# Altium PCB MDES_V3.PcbDoc (part 1 of 2)
Units mil, origin at the board's own origin, x right, y up, seen from the top; angles counter-clockwise.
Board outline 6000 x 4000 mil, 6 copper layers (Component Side, Ground Plane (GND), Inner Layer 1, Inner Layer 2, Power Plane (VCC), Solder Side), stack 51.068 mil thick; 209 components, 153 nets, 733 pads, 136 vias.
Unrouted connection lines stored in the file: 303.
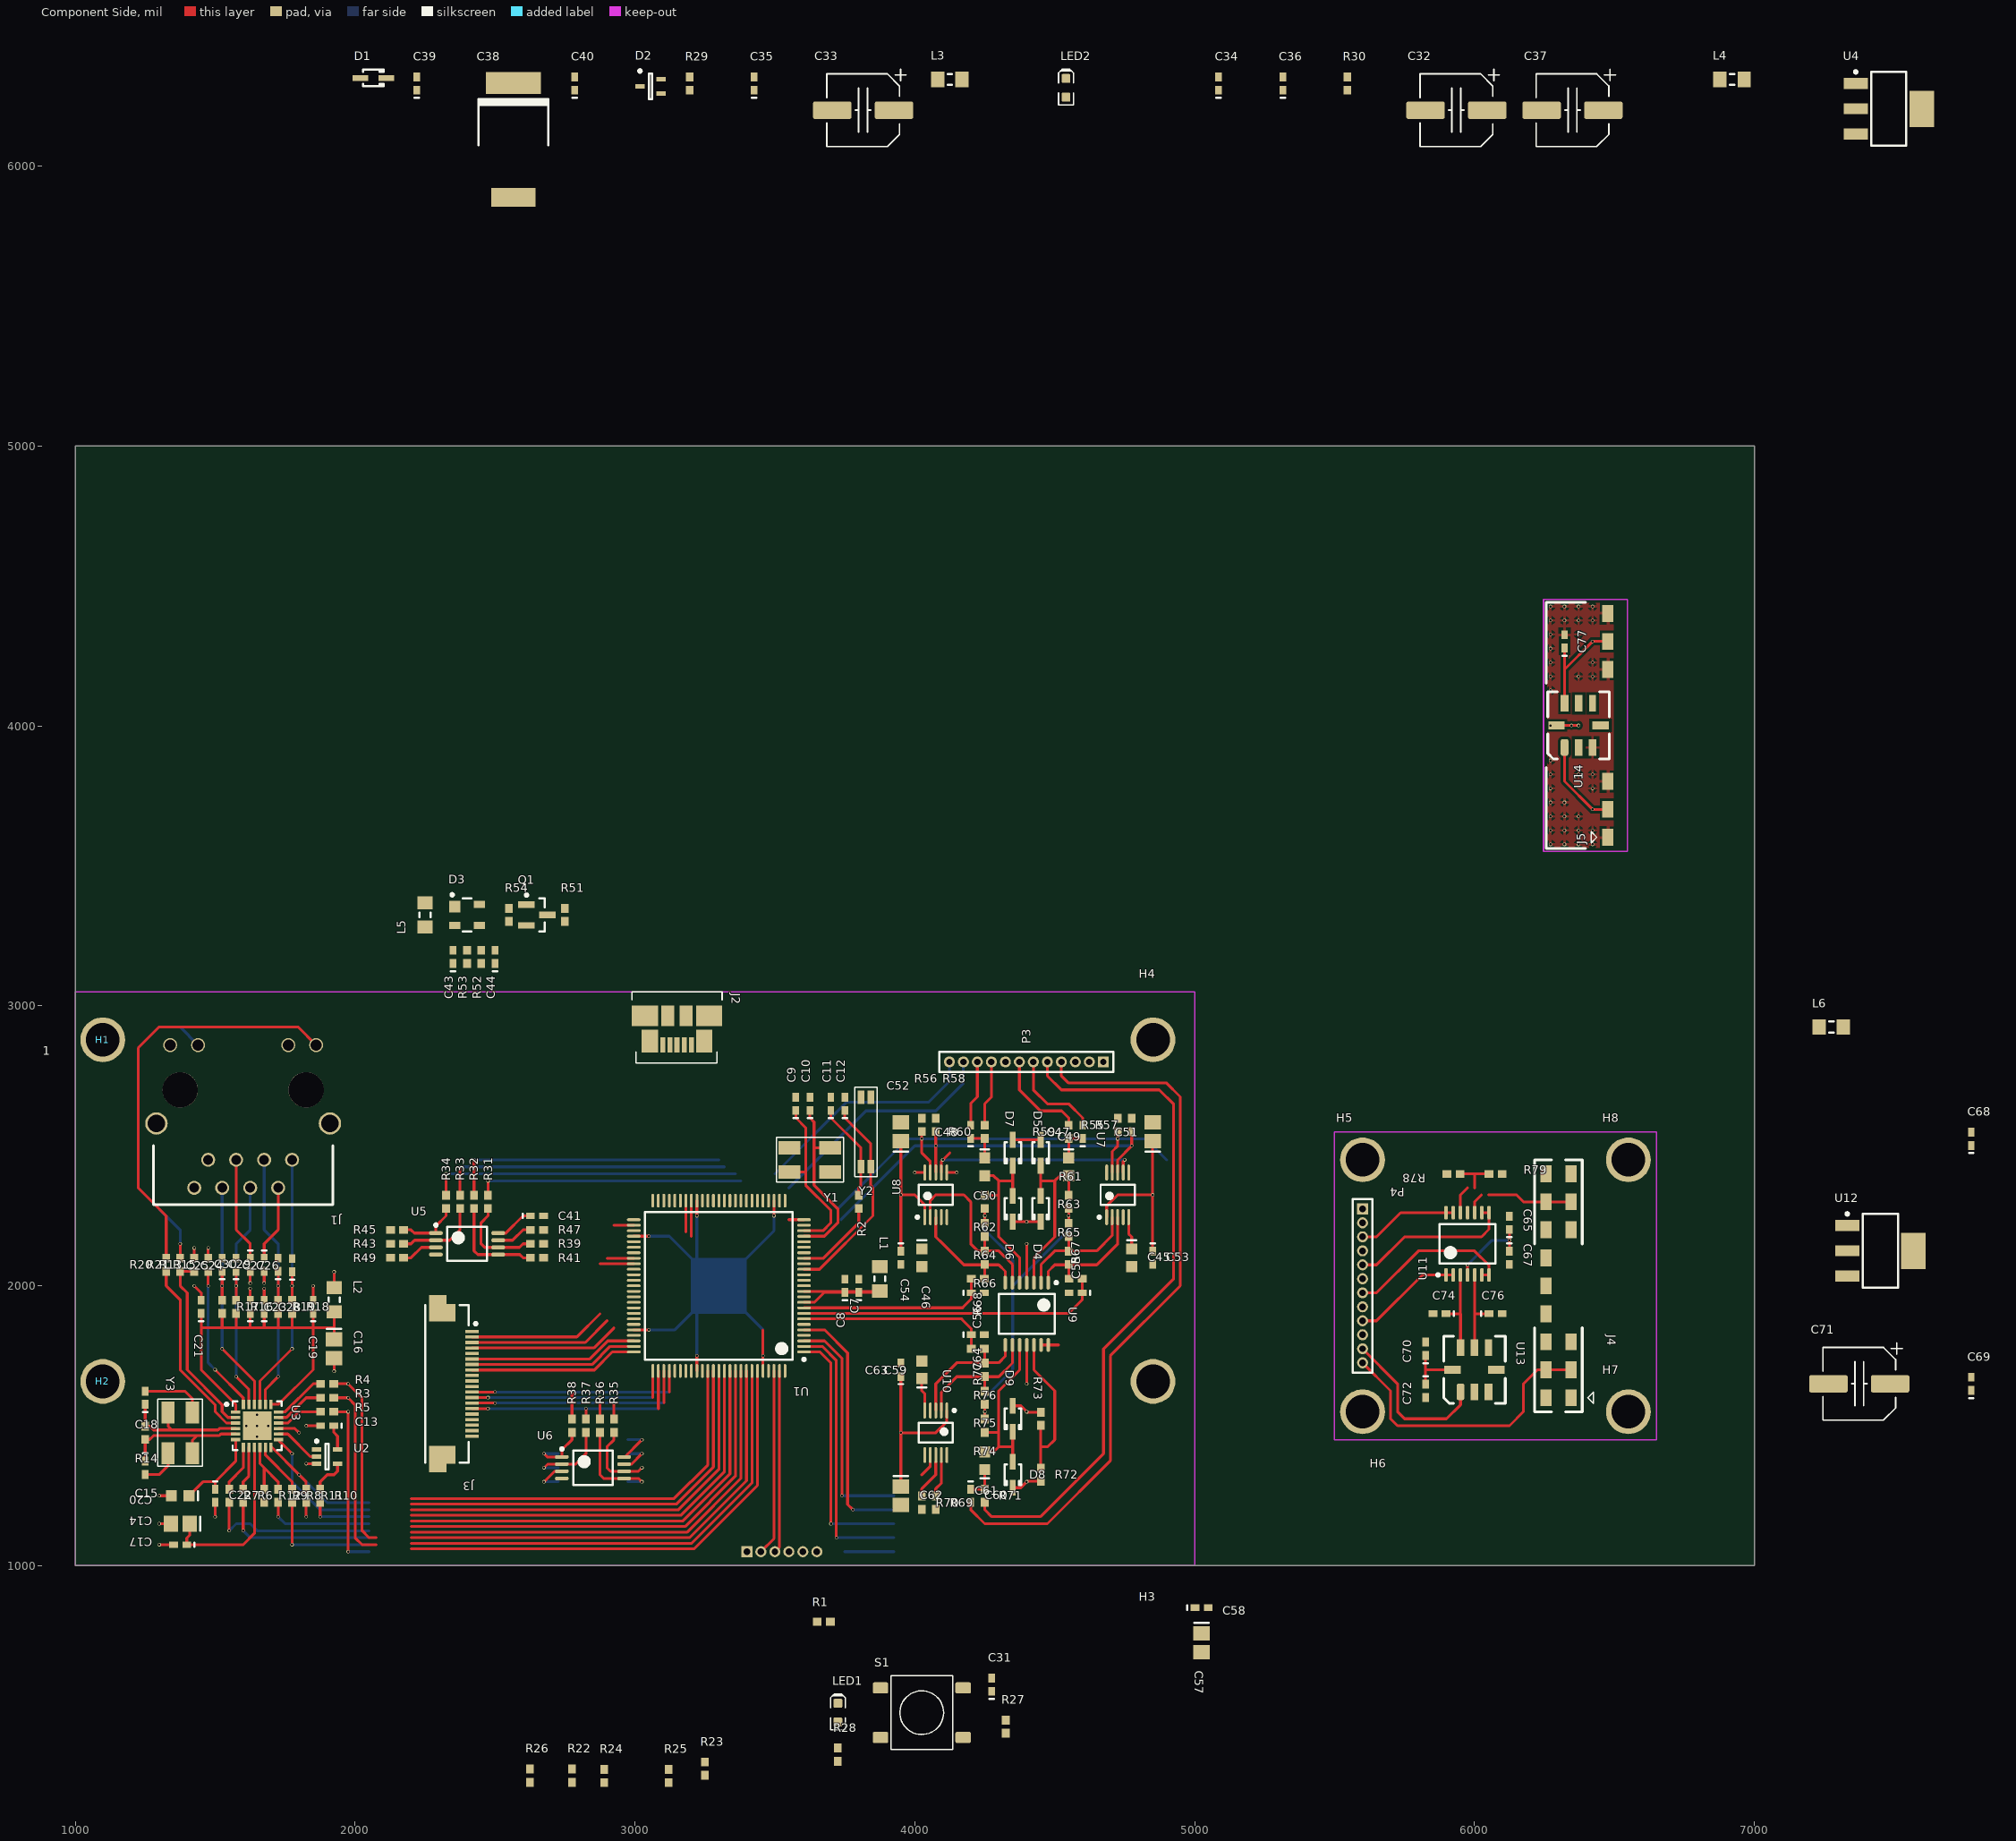
[diagram p0: Component Side view]
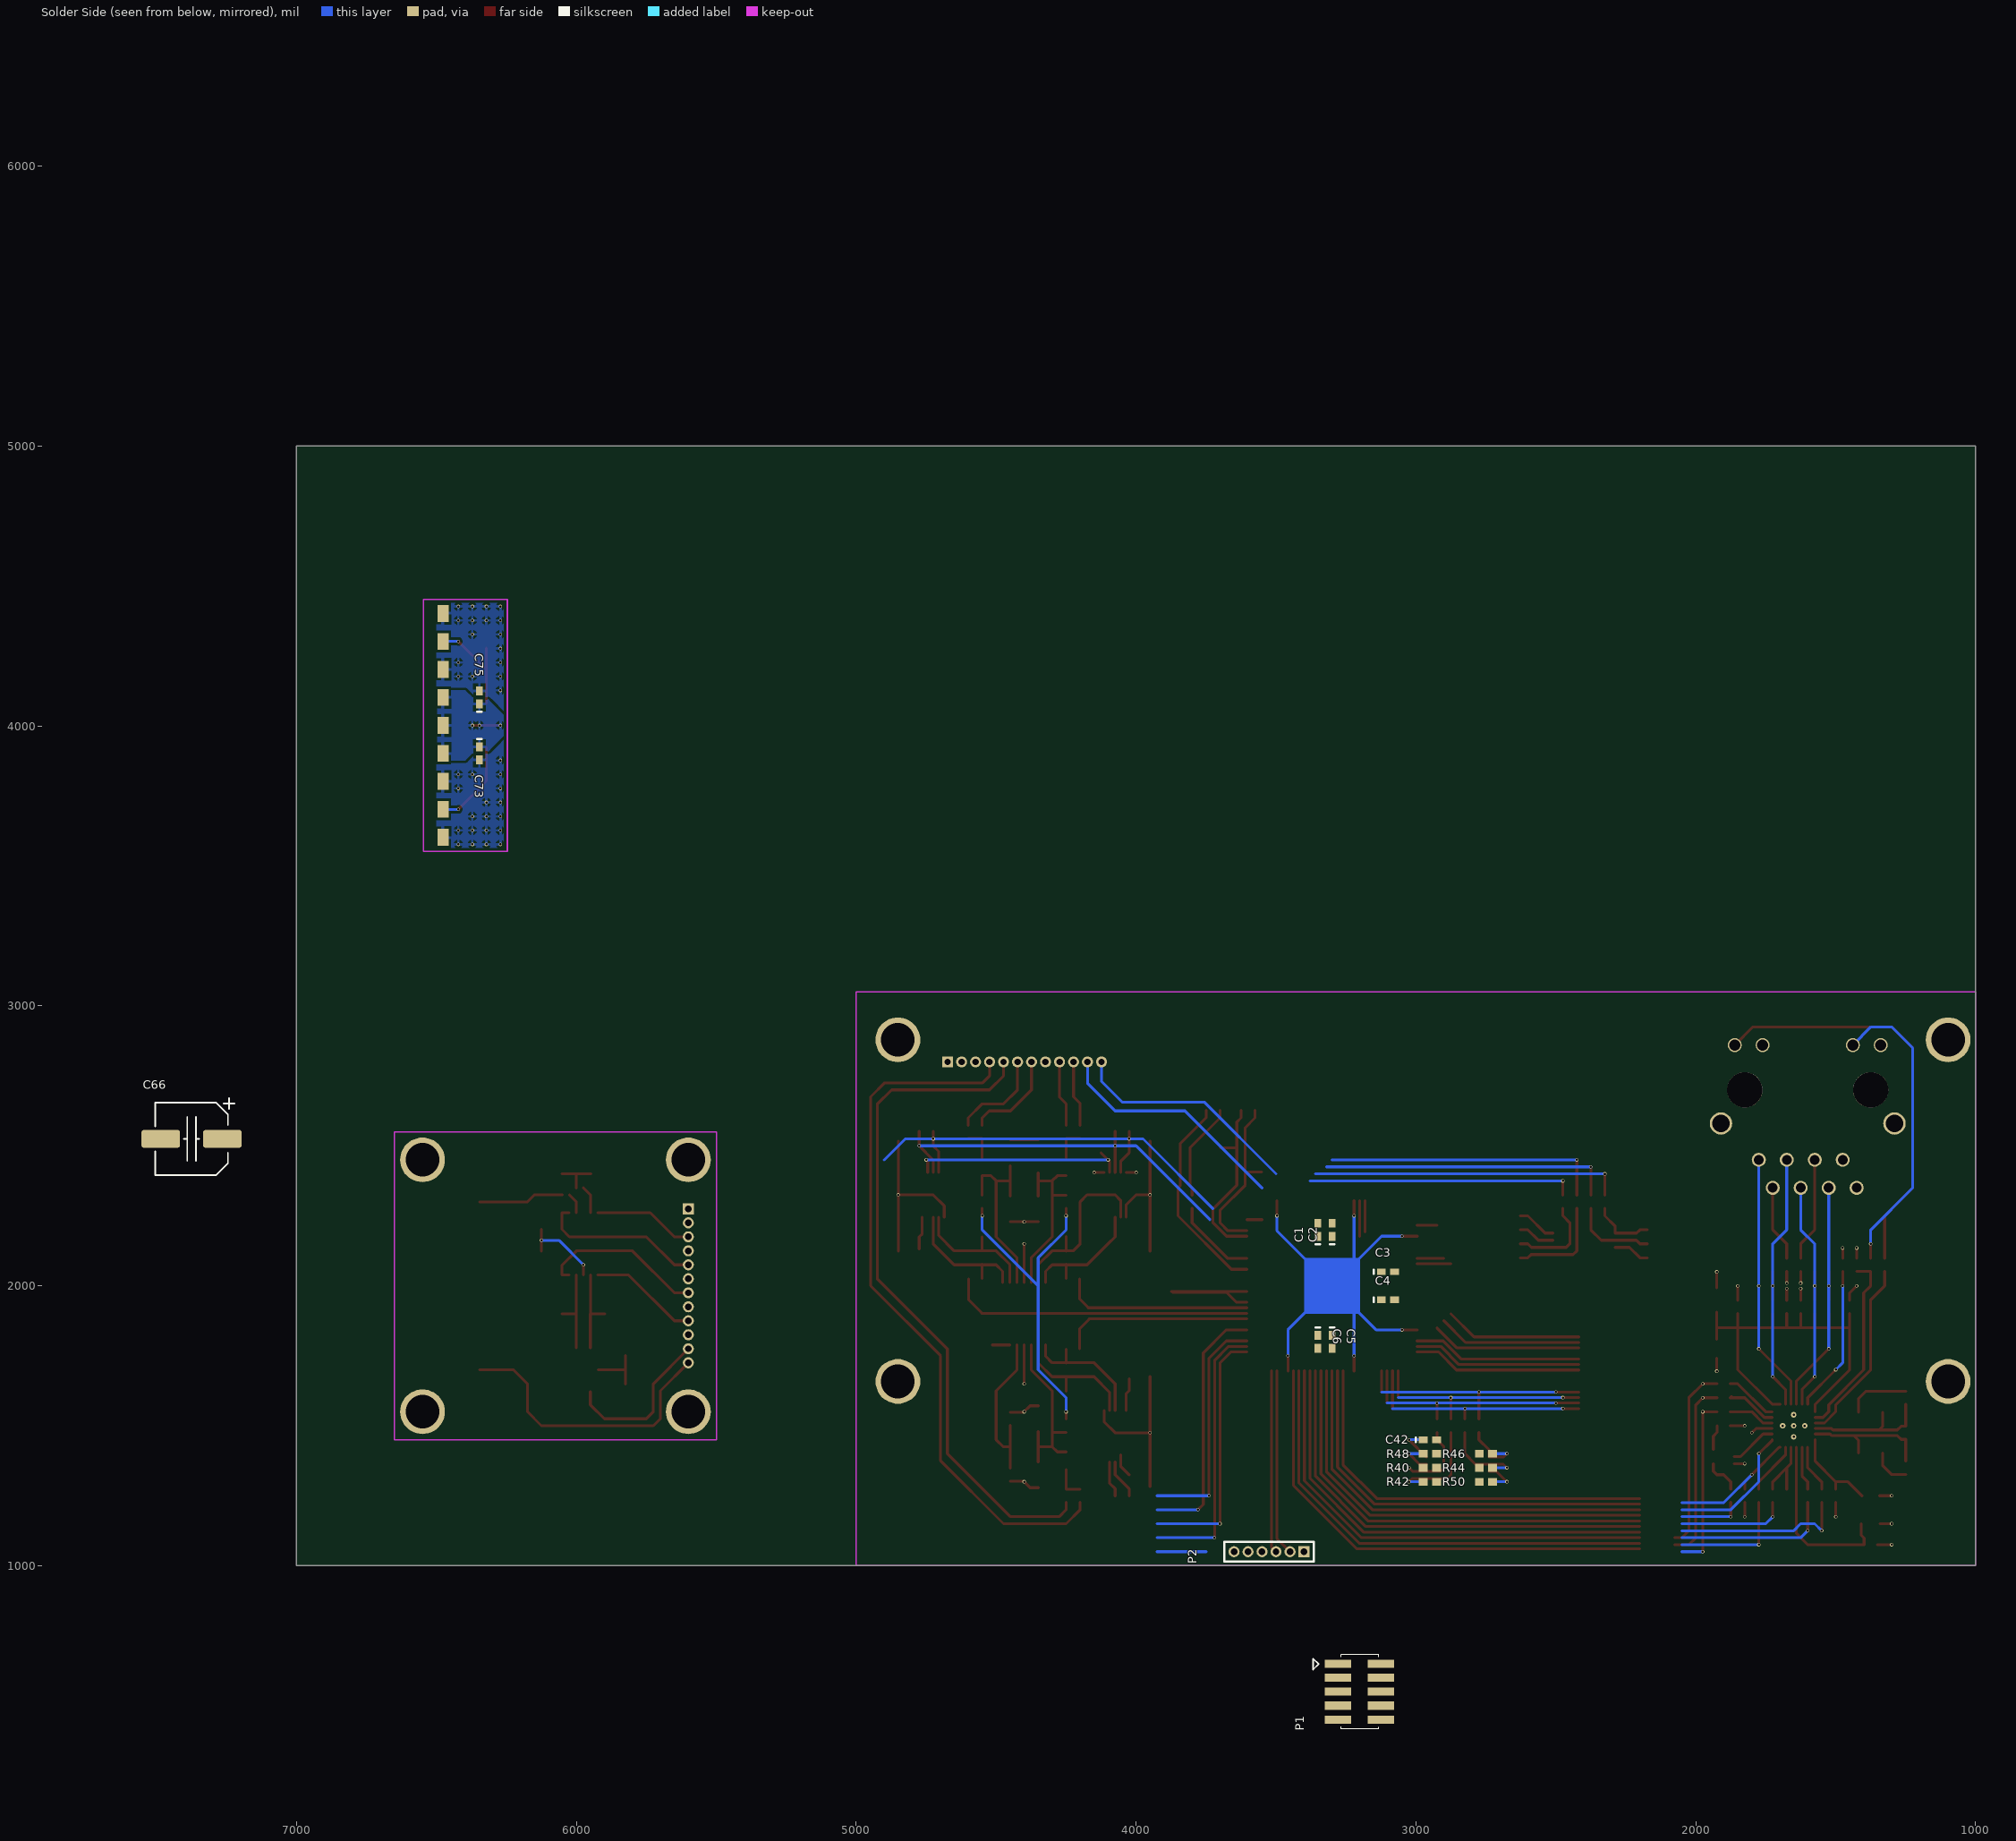
[diagram p1: Solder Side view, seen from below]
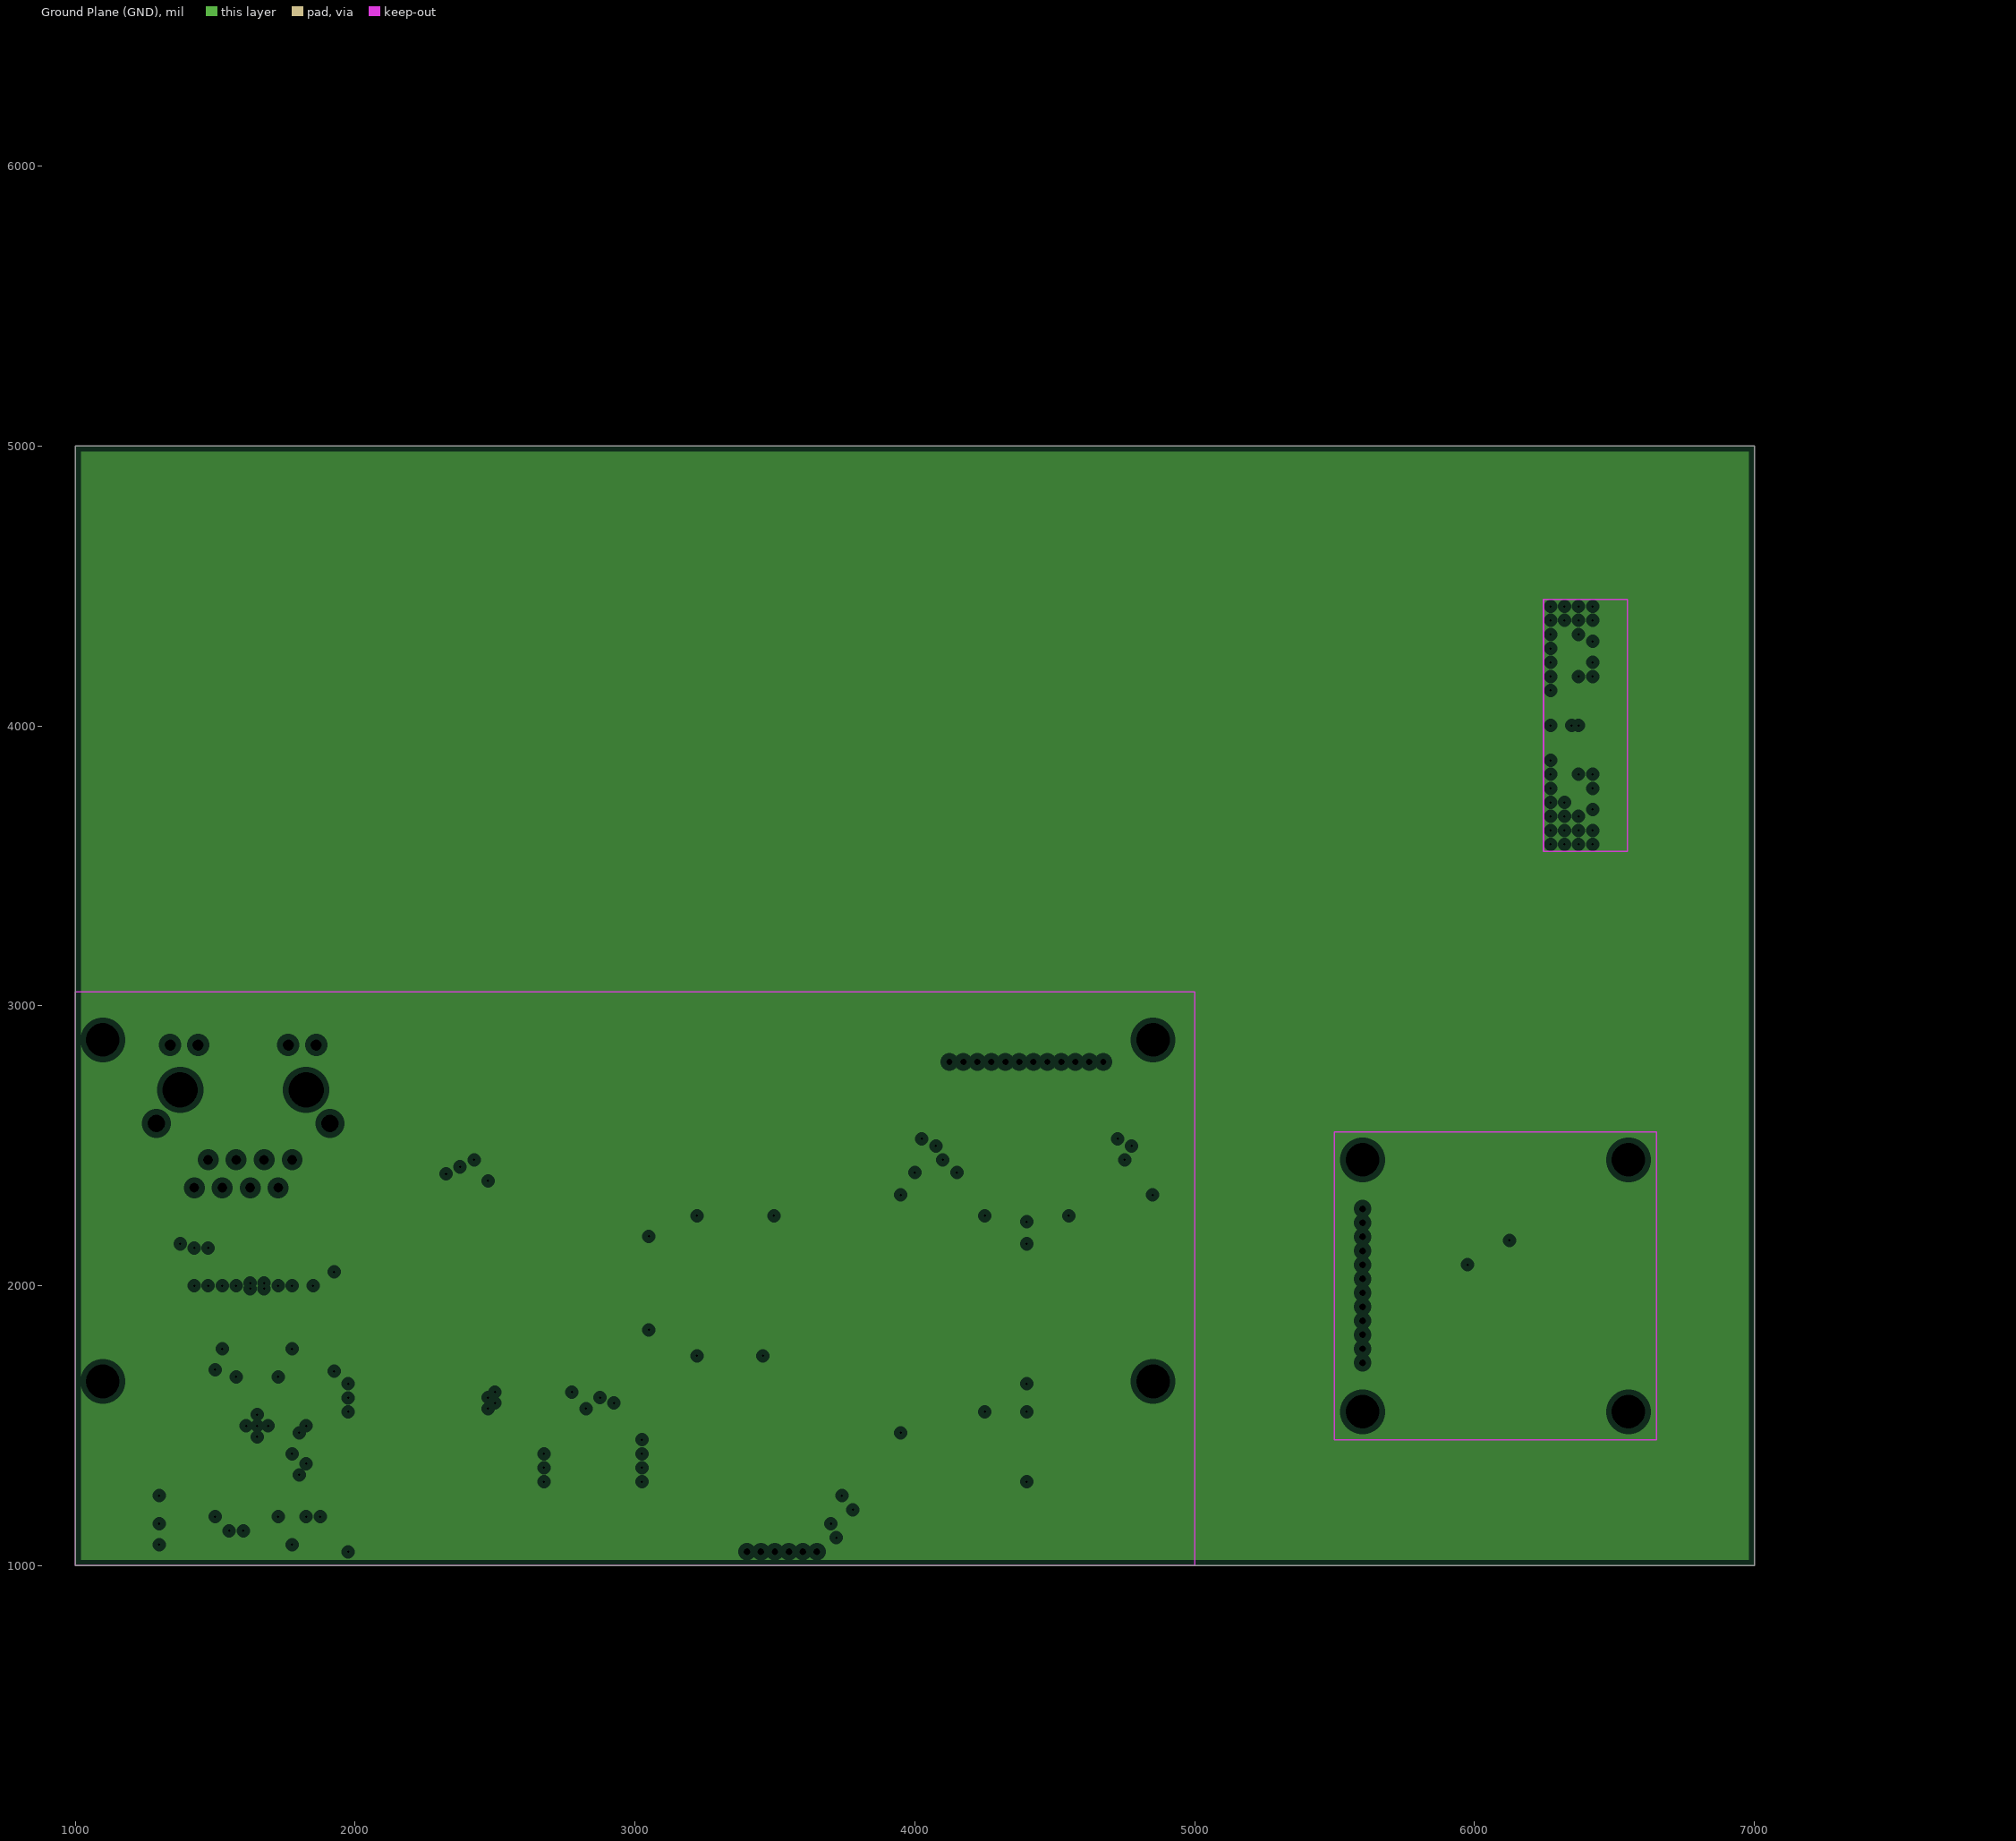
[diagram p2: Ground Plane (GND), clearances drawn from the general rule]
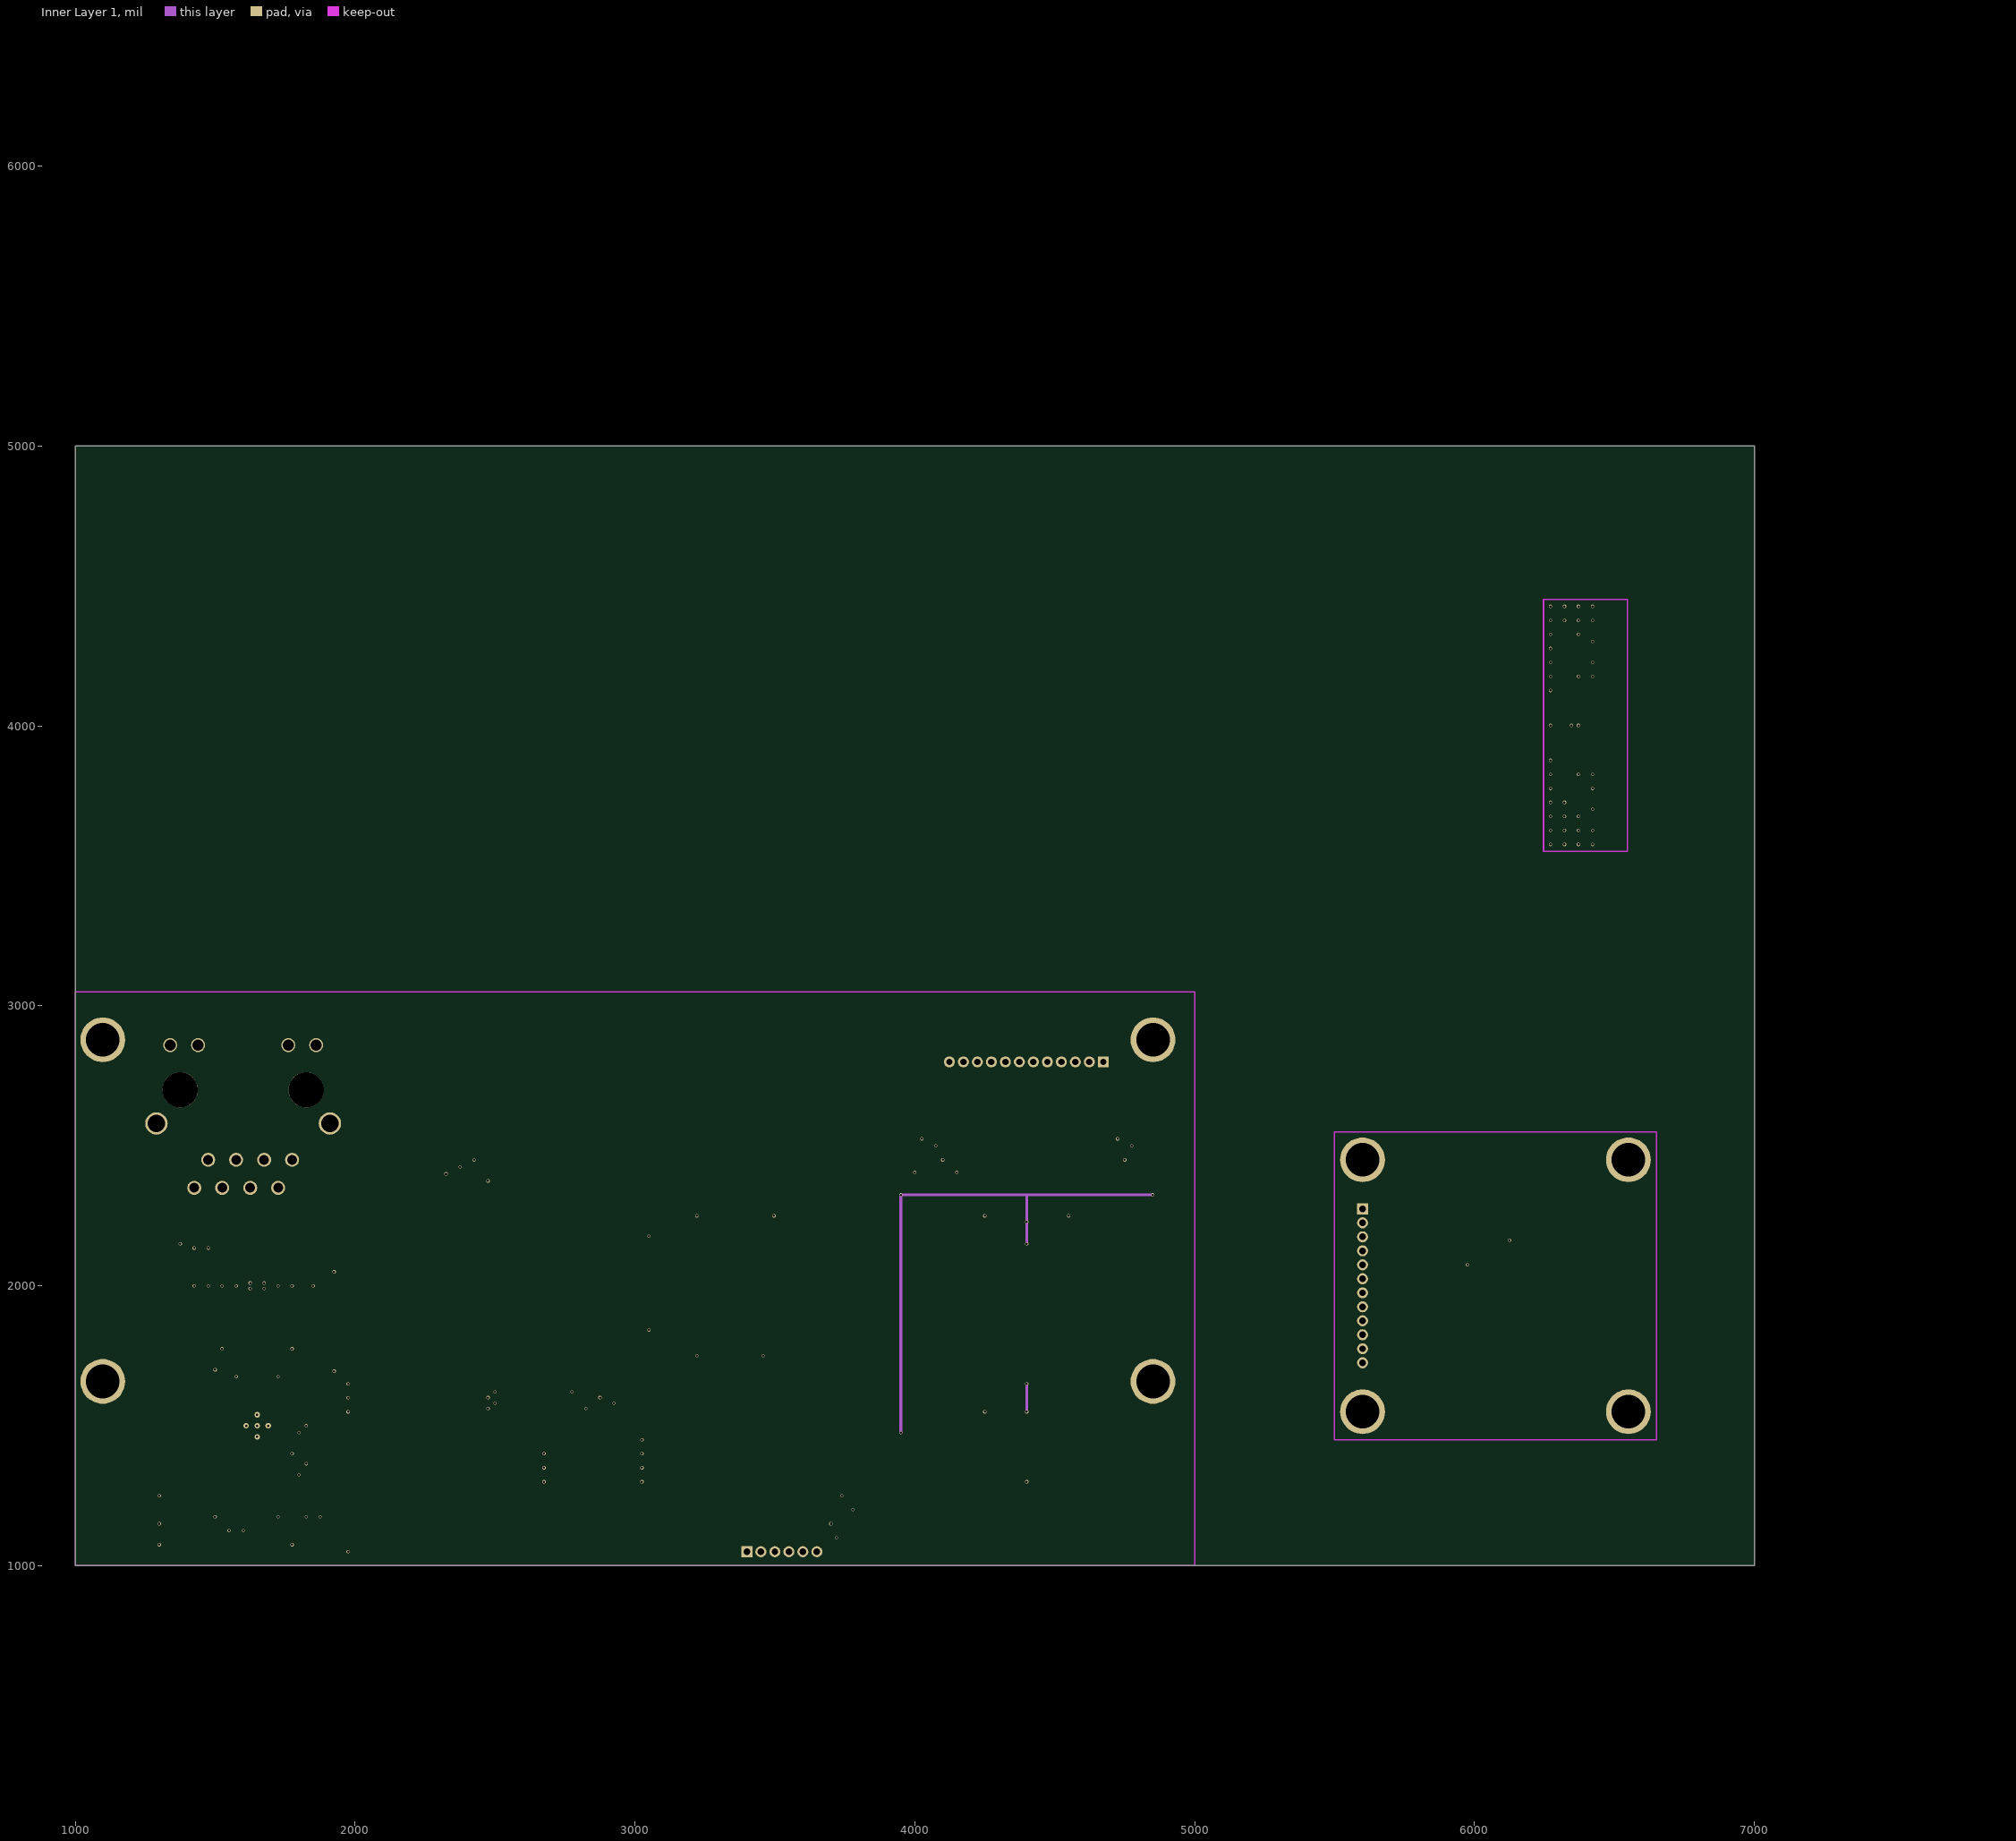
[diagram p3: Inner Layer 1]
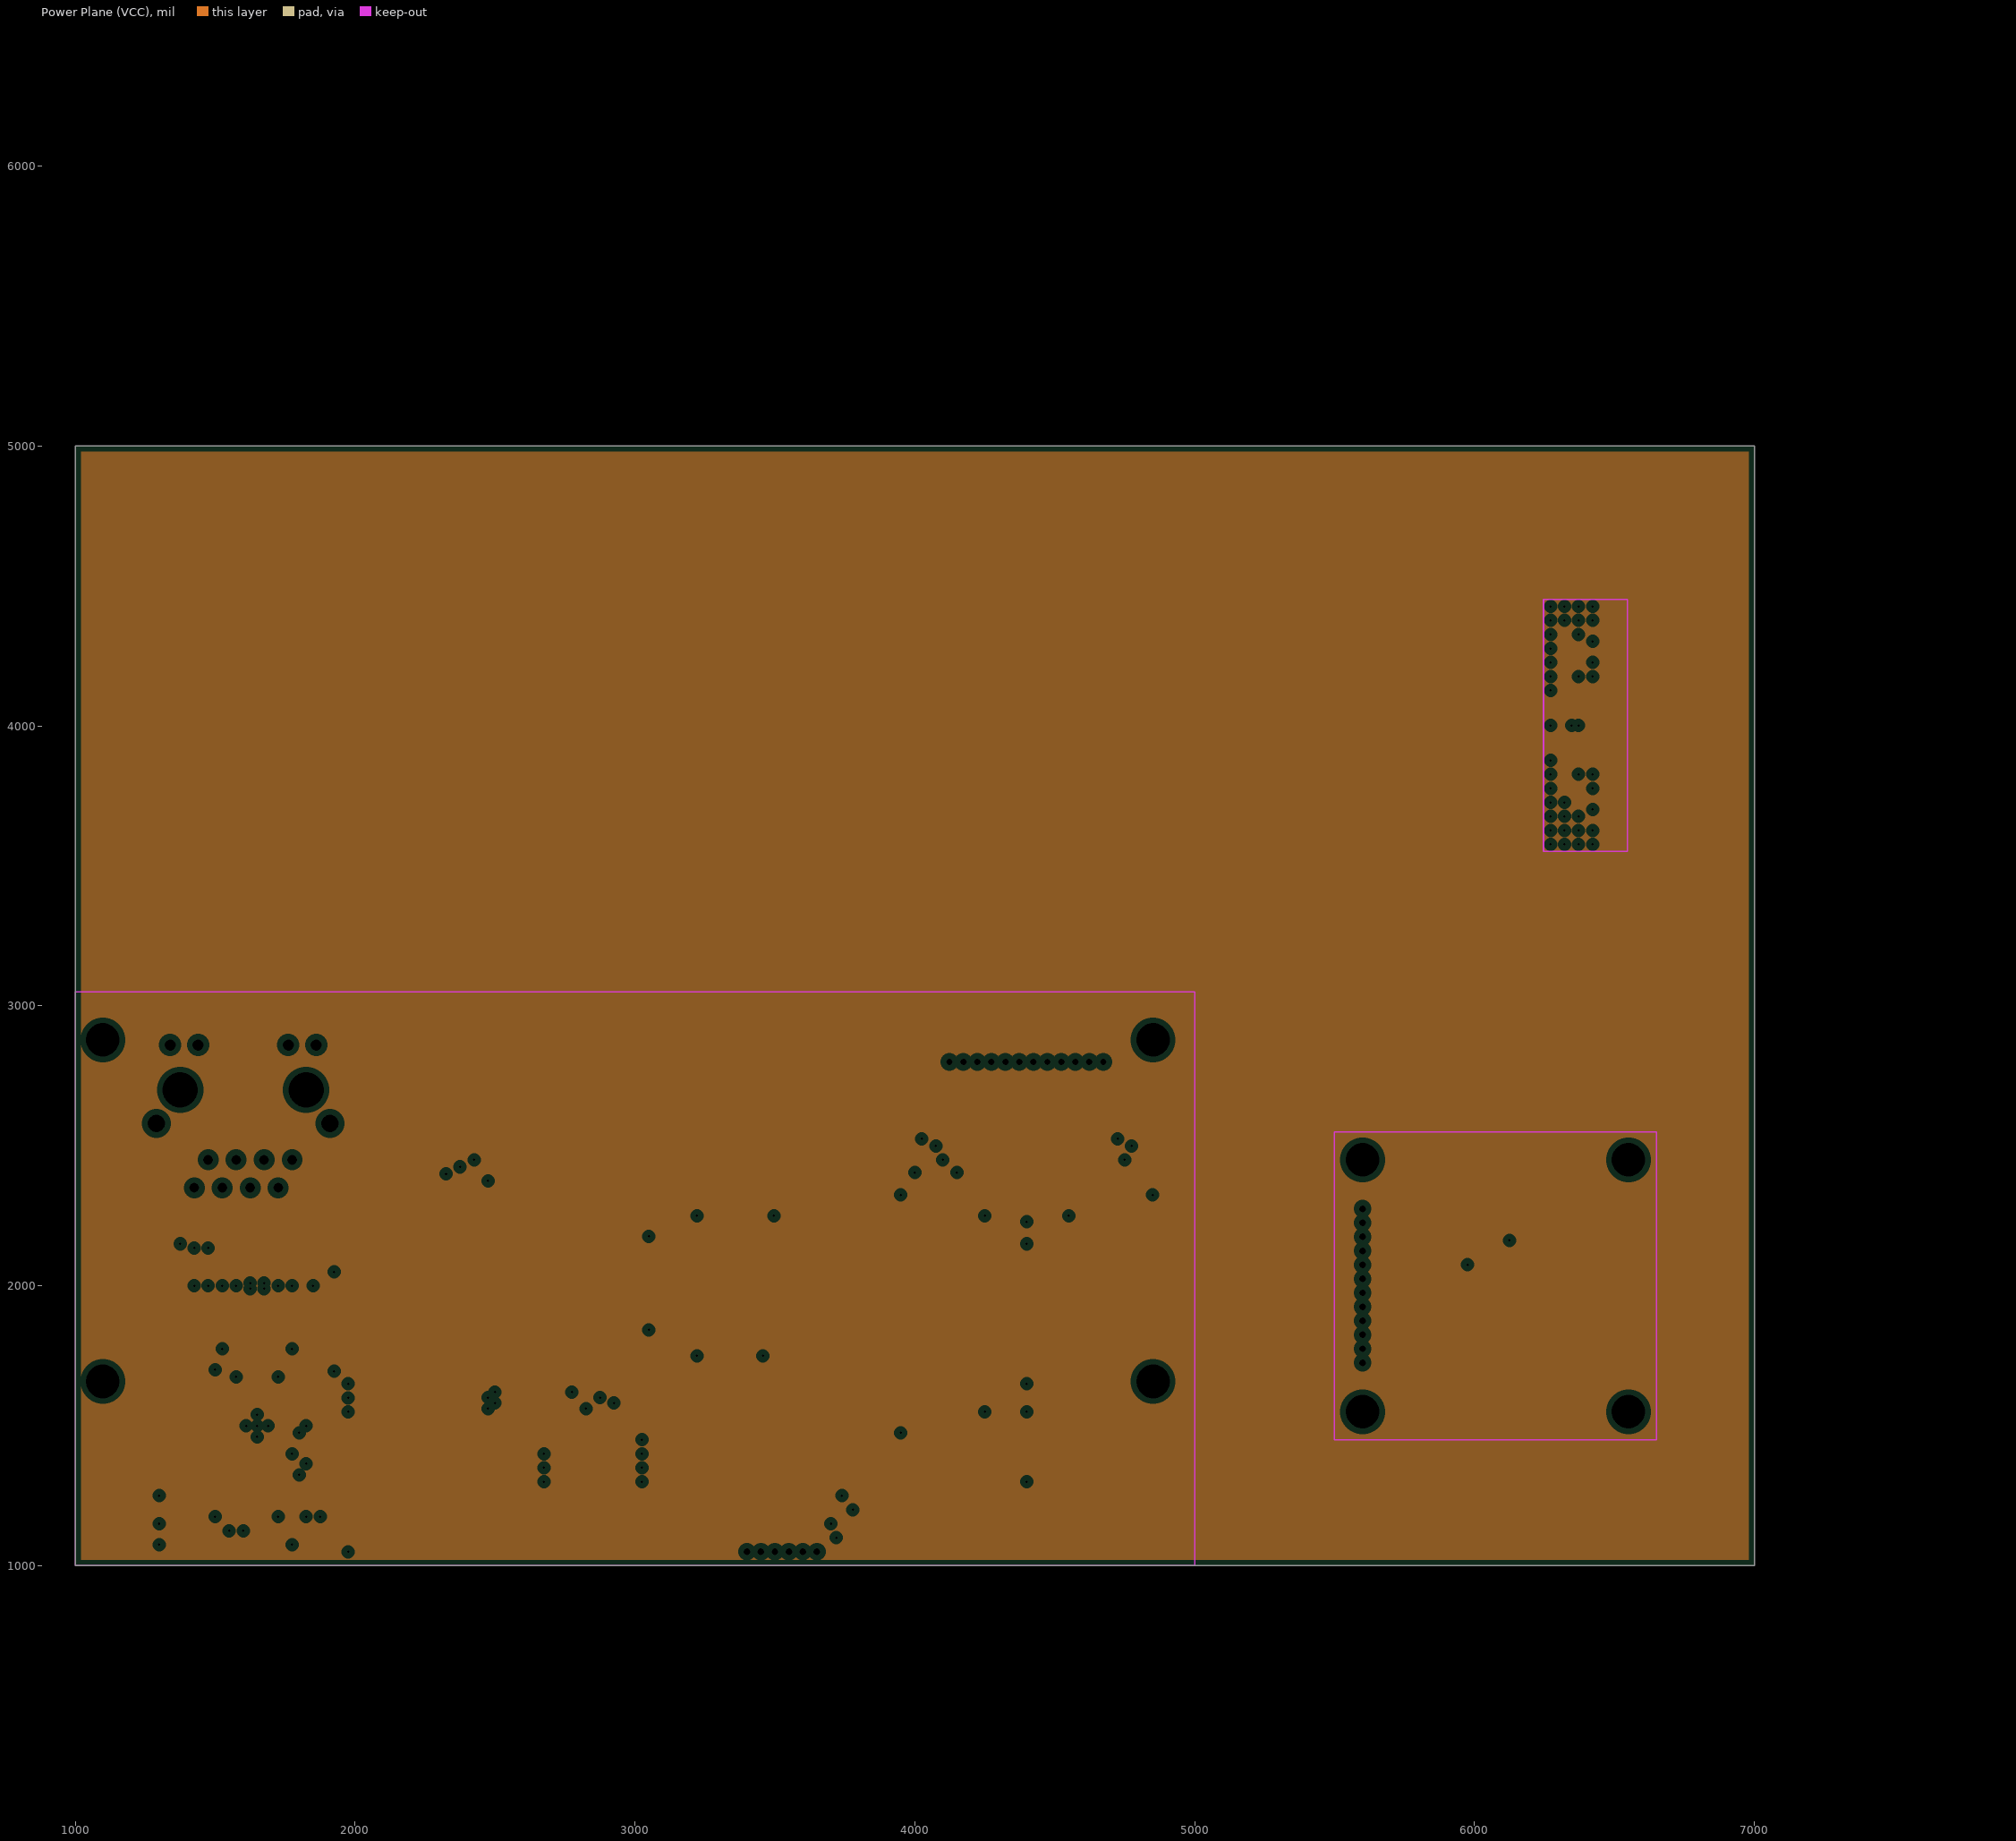
[diagram p4: Power Plane (VCC), clearances drawn from the general rule]

## Layer stack, top to bottom
Top Solder: solder mask 0.4, Solder Resist, Dk 3.5
Component Side: signal copper 1.4
Dielectric 1: core 12.6, FR-4, Dk 4.8
Ground Plane (GND): plane copper 1.417
Dielectric 3: prepreg 5, Dk 4.2
Inner Layer 1: signal copper 1.417
Dielectric 6: core 10, Dk 4.2
Inner Layer 2: signal copper 1.417
Dielectric 5: prepreg 5, Dk 4.2
Power Plane (VCC): plane copper 1.417
Dielectric 4: core 10, Dk 4.2
Solder Side: signal copper 1.4
Bottom Solder: solder mask 0.4, Solder Resist, Dk 3.5

## Board outline
1000,1000 7000,1000 7000,5000 1000,5000

## Design rules (kind name [scope] priority, off if disabled: settings)
Clearance Clearance_BTB [InComponent('J5') vs OnLayer('Keep-Out Layer')] p1: gap=-10
Clearance [All] p2: gap=6
ComponentClearance ComponentClearance_BTB [InComponent('J5')] p1: gap=0 collisioncheckmode=3 verticalgap=0 showdistances=FALSE
ComponentClearance [All] p2: gap=10 collisioncheckmode=3 verticalgap=10 showdistances=FALSE
PlaneClearance [All] p1: clearance=20
PlaneConnect [All] p1: planeconnectstyle=Relief reliefexpansion=20 reliefentries=4 reliefconductorwidth=10 reliefairgap=10
PolygonConnect [All] p1: connectstyle=Relief reliefconductorwidth=10 reliefentries=4 polygonreliefangle="90 Angle" airgapwidth=10
RoutingVias [All] p1: holewidth=120 width=180 viastyle="Through Hole" minholewidth=8 minwidth=12 maxholewidth=28 maxwidth=50
SolderMaskExpansion [All] p1: expansion=4
Width [All] p1: maxlimit=10 minlimit=10 preferedwidth=10
27 further rules are at their usual default settings.

## Classes and differential pairs
component class Accelerometer: C65 C66 C67 C68 C69 C70 C71 C72 C73 C74 C75 C76 C77 H5 H6 H7 H8 J4 J5 L6 P4 R78 R79 U11 U12 U13 U14
component class "Analog Input": C45 C46 C47 C48 C49 C50 C51 C52 C53 C54 C55 C56 C57 C58 C59 C60 C61 C62 C63 C64 D4 D5 D6 D7 D8 D9 P3 R55 R56 R57 R58 R59 R60 R61 R62 R63 R64 R65 R66 R67 R68 R69 R70 R71 R72 R73 R74 R75 R76 R77 U7 U8 U9 U10
component class "Debug and Reset": C31 LED1 P1 P2 R22 R23 R24 R25 R26 R27 R28 S1
component class Ethernet: C13 C14 C15 C16 C17 C18 C19 C20 C21 C22 C23 C24 C25 C26 C27 C28 C29 C30 J1 L2 R3 R4 R5 R6 R7 R8 R9 R10 R11 R12 R13 R14 R15 R16 R17 R18 R19 R20 R21 U2 U3 Y3
component class "Expansion connectors": J3
component class LPC1769: C1 C2 C3 C4 C5 C6 C7 C8 C9 C10 C11 C12 L1 R1 R2 U1 Y1 Y2
component class "Power supply": C32 C33 C34 C35 C36 C37 C38 C39 C40 D1 D2 H1 H2 H3 H4 L3 L4 LED2 R29 R30 U4
component class "SPI peripherals": C41 C42 R31 R32 R33 R34 R35 R36 R37 R38 R39 R40 R41 R42 R43 R44 R45 R46 R47 R48 R49 R50 U5 U6
component class USB: C43 C44 D3 J2 L5 Q1 R51 R52 R53 R54

## Components (designator, comment, footprint, x,y, rotation, side; value= is the part's Value field where it differs from the comment)
C1 "100n" CAPC1005N 3350,2200 r90 bottom
C2 "10n" CAPC1005N 3300,2200 r90 bottom
C3 "100n" CAPC1005N 3100,2050 r180 bottom
C4 "10n" CAPC1005N 3100,1950 r180 bottom
C5 "100n" CAPC1005N 3300,1800 r270 bottom
C6 "10n" CAPC1005N 3350,1800 r270 bottom
C7 "100n" CAPC1005N 3800,2000 r90 top
C8 "10n" CAPC1005N 3750,2000 r90 top
C9 "22p" CAPC1005N 3575,2650 r90 top
C10 "22p" CAPC1005N 3625,2650 r90 top
C11 "22p" CAPC1005N 3700,2650 r90 top
C12 "22p" CAPC1005N 3750,2650 r90 top
C13 "100n" CAPC1005N 1900,1500 r180 top
C14 "10u" CAPC2012N 1375,1150 r180 top
C15 "18p" CAPC1005N 1250,1350 r270 top
C16 "10u" CAPC2012N 1925,1775 r270 top
C17 "100n" CAPC1005N 1375,1075 r180 top
C18 "18p" CAPC1005N 1250,1600 r90 top
C19 "100n" CAPC1005N 1850,1925 r90 top
C20 "1u" CAPC1608N 1375,1250 r180 top
C21 "100n" CAPC1005N 1450,1925 r90 top
C22 "100n" CAPC1005N 1500,1250 r270 top
C23 "100n" CAPC1005N 1625,1925 r90 top
C24 "18p" CAPC1005N 1575,2075 r90 top
C25 "18p" CAPC1005N 1525,2075 r90 top
C26 "18p" CAPC1005N 1775,2073.62 r90 top
C27 "18p" CAPC1005N 1725,2075 r90 top
C28 "100n" CAPC1005N 1675,1925 r90 top
C29 "100n" CAPC1005N 1675,2075 r270 top
C30 "100n" CAPC1005N 1625,2075 r270 top
C31 "100n" CAPC1005N 4275,575 r90 top
C32 "220uF" CAP_ELEC_SIZE_D8 5935.24,6200 r0 top
C33 "220uF" CAP_ELEC_SIZE_D8 3815.24,6200 r0 top
C34 "100n" CAPC1005N 5085.24,6295 r90 top
C35 "100n" CAPC1005N 3425.24,6295 r90 top
C36 "100n" CAPC1005N 5315.24,6295 r90 top
C37 "220uF" CAP_ELEC_SIZE_D8 6350.24,6200 r0 top
C38 "220mF" CAPC3225N 2565.24,6090 r0 top
C39 "10u" CAPC1005N 2220.24,6295 r90 top
C40 "100n" CAPC1005N 2785.24,6295 r90 top
C41 "100n" CAPC1005N 2650,2250 r0 top
C42 "100n" CAPC1005N 2950,1450 r180 bottom
C43 "18p" CAPC1005N 2350,3175 r90 top
C44 "18p" CAPC1005N 2500,3175 r90 top
C45 "1u" CAPC1608N 4775,2100 r270 top
C46 "1u" CAPC1608N 4025,2100 r270 top
C47 "100n" CAPC1005N 4600,2550 r90 top
C48 "100n" CAPC1005N 4200,2550 r90 top
C49 "1u" CAPC1608N 4550,2425 r270 top
C50 "1u" CAPC1608N 4250,2425 r270 top
C51 "10u" CAPC2012N 4850,2550 r90 top
C52 "10u" CAPC2012N 3950,2550 r90 top
C53 "100n" CAPC1005N 4850,2100 r270 top
C54 "100n" CAPC1005N 3950,2100 r270 top
C55 "100n" CAPC1005N 4575,1975 r180 top
C56 "100n" CAPC1005N 4225,1975 r0 top
C57 "10u" CAPC2012N 5025,725 r270 top
C58 "100n" CAPC1005N 5025,850 r0 top
C59 "1u" CAPC1608N 4025,1700 r90 top
C60 "100n" CAPC1005N 4200,1250 r270 top
C61 "1u" CAPC1608N 4250,1375 r90 top
C62 "10u" CAPC2012N 3950,1250 r270 top
C63 "100n" CAPC1005N 3950,1700 r90 top
C64 "100n" CAPC1005N 4225,1825 r0 top
C65 "10u" CAPC1005N 6125,2225 r90 top
C66 "220uF" CAP_ELEC_SIZE_D8 7375,2525 r180 bottom
C67 "100n" CAPC1005N 6125,2100 r270 top
C68 "100n" CAPC1005N 7775,2525 r90 top
C69 "100n" CAPC1005N 7775,1650 r90 top
C70 "100n" CAPC1005N 5825,1775 r90 top
C71 "220uF" CAP_ELEC_SIZE_D8 7375,1650 r0 top
C72 "10n" CAPC1005N 5825,1625 r270 top
C73 "100n" CAPC1005N 6346.81,3902.13 r270 bottom
C74 "1n" CAPC1005N 5875,1900 r180 top
C75 "10n" CAPC1005N 6346.81,4102.13 r90 bottom
C76 "1n" CAPC1005N 6075,1900 r0 top
C77 "1n" CAPC1005N 6321.81,4302.13 r90 top
D1 "UL" SOD323 2065.24,6315 r0 top
D2 "BAS40-05W" SOT323(SC70) 3055.24,6285 r0 top
D3 "PRTR5V0U2X" SOT190P230X120-4N 2400,3325 r0 top
D4 "1N4448" SOD323 4450,2275 r270 top
D5 "1N4448" SOD323 4450,2475 r270 top
D6 "1N4448" SOD323 4350,2275 r270 top
D7 "1N4448" SOD323 4350,2475 r270 top
D8 "1N4448" SOD323 4350,1325 r270 top
D9 "1N4448" SOD323 4350,1525 r270 top
H1 "3.1mm" Holes#1 700,2900 r0 top
H2 "3.1mm" Holes#2 500,1200 r0 top
H3 "3.1mm" Holes#3 6000,700 r0 top
H4 "3.1mm" Holes#4 6100,3400 r0 top
H5 "3.1mm" Holes#5 5600,2450 r0 top
H6 "3.1mm" Holes#5 5600,1550 r0 top
H7 "3.1mm" Holes#5 6550,1550 r0 top
H8 "3.1mm" Holes#5 6550,2450 r0 top
J1 "ARJC02-111008B" ARJC02-111008B 1600,2700 r180 top
J2 "USB_Micro" USB_micro 3150,3050 r270 top
J3 "FFC 20P 0.5mm" FPC_20P_0.5mm 2250,1650 r270 top
J4 "BTB" BTB_B 6300,2000 r90 top
J5 "BTB" BTB_S 6496.81,4002.13 r90 top
L1 "BLM21PG221SN1D" INDC2012N 3875,2025 r270 top
L2 "BLM21PG221SN1D" INDC2012N 1925,1950 r270 top
L3 "BLM21PG221SN1D" INDC2012N 4125.24,6310 r0 top
L4 "BLM21PG221SN1D" INDC2012N 6920.24,6310 r0 top
L5 "BLM21PG221SN1D" INDC2012N 2250,3325 r90 top
L6 "BLM21PG221SN1D" INDC2012N 7275,2925 r0 top
LED1 "Red" LED-0603-RED 3725,475 r90 top
LED2 "Green" LED-0603-GREEN 4540.24,6280 r90 top
P1 "Header 5X2" "Header 5x2 1.27mm" 3200,550 r90 bottom
P2 "MHDR1X6" MHDR1X6 3400,1050 r0 bottom
P3 "MHDR1X12" MHDR1X12 4673.62,2800 r180 top
P4 "MHDR1X12" MHDR1X12 5600,2275 r270 top
Q1 "BCX17" SOT23-3N 2650,3325 r0 top
R1 "10K" RESC1005N 3675,800 r0 top
R2 "100K" RESC1005N 3800,2300 r90 top
R3 "22R" RESC1005N 1900,1600 r180 top
R4 "22R" RESC1005N 1900,1650 r180 top
R5 "22R" RESC1005N 1900,1550 r180 top
R6 "22R" RESC1005N 1600,1250 r90 top
R7 "22R" RESC1005N 1550,1250 r90 top
R8 "22R" RESC1005N 1775,1250 r90 top
R9 "22R" RESC1005N 1725,1250 r90 top
R10 "22R" RESC1005N 1875,1250 r90 top
R11 "1K5" RESC1005N 1825,1250 r90 top
R12 "10K" RESC1005N 1675,1250 r90 top
R13 "10K" RESC1005N 1425,2075 r90 top
R14 "1M" RESC1005N 1250,1475 r90 top
R15 "12K1" RESC1005N 1475,2075 r90 top
R16 "50R" RESC1005N 1575,1925 r90 top
R17 "50R" RESC1005N 1525,1925 r90 top
R18 "50R" RESC1005N 1775,1925 r90 top
R19 "50R" RESC1005N 1725,1925 r90 top
R20 "270R" RESC1005N 1325,2075 r90 top
R21 "270R" RESC1005N 1375,2075 r90 top
R22 "33K" RESC1005N 2775,250 r90 top
R23 "33K" RESC1005N 3250,275 r90 top
R24 "33K" RESC1005N 2890,248.62 r90 top
R25 "33K" RESC1005N 3120,248.62 r90 top
R26 "100R" RESC1005N 2625,250 r90 top
R27 "33K" RESC1005N 4325,425 r90 top
R28 "470R" RESC1005N 3725,325 r90 top
R29 "33R" RESC1005N 3195.24,6295 r90 top
R30 "270R" RESC1005N 5545.24,6295 r90 top
R31 "22R" RESC1005N 2475,2300 r270 top
R32 "22R" RESC1005N 2425,2300 r270 top
R33 "22R" RESC1005N 2375,2300 r270 top
R34 "22R" RESC1005N 2325,2300 r270 top
R35 "22R" RESC1005N 2925,1500 r270 top
R36 "22R" RESC1005N 2875,1500 r270 top
R37 "22R" RESC1005N 2825,1500 r270 top
R38 "22R" RESC1005N 2775,1500 r270 top
R39 "100K" RESC1005N 2650,2150 r0 top
R40 "100K" RESC1005N 2950,1350 r180 bottom
R41 "10K" RESC1005N 2650,2100 r180 top
R42 "10K" RESC1005N 2950,1300 r0 bottom
R43 "10K" RESC1005N 2150,2150 r0 top
R44 "10K" RESC1005N 2750,1350 r180 bottom
R45 "10K" RESC1005N 2150,2200 r0 top
R46 "10K" RESC1005N 2750,1400 r180 bottom
R47 "10K" RESC1005N 2650,2200 r180 top
R48 "10K" RESC1005N 2950,1400 r0 bottom
R49 "10K" RESC1005N 2150,2100 r0 top
R50 "10K" RESC1005N 2750,1300 r180 bottom
R51 "1K5" RESC1005N 2750,3325 r90 top
R52 "33R" RESC1005N 2450,3175 r90 top
R53 "33R" RESC1005N 2400,3175 r90 top
R54 "1K5" RESC1005N 2550,3325 r90 top
R55 "3K3" RESC1005N 4725,2575 r270 top
R56 "3K3" RESC1005N 4025,2575 r270 top
R57 "3K3" RESC1005N 4775,2575 r270 top
R58 "3K3" RESC1005N 4075,2575 r270 top
R59 "750K" RESC1005N 4550,2550 r270 top
R60 "750K" RESC1005N 4250,2550 r270 top
R61 "250K" RESC1005N 4550,2300 r270 top
R62 "250K" RESC1005N 4250,2300 r270 top
R63 "10K" RESC1005N 4550,2200 r270 top
R64 "10K" RESC1005N 4250,2200 r270 top
R65 "90K" RESC1005N 4550,2100 r270 top
R66 "90K" RESC1005N 4250,2100 r270 top
R67 "270K" RESC1005N 4575,2025 r0 top
R68 "270K" RESC1005N 4225,2025 r180 top
R69 "3K3" RESC1005N 4075,1225 r90 top
R70 "3K3" RESC1005N 4025,1225 r90 top
R71 "750K" RESC1005N 4250,1250 r90 top
R72 "10K" RESC1005N 4450,1325 r90 top
R73 "10K" RESC1005N 4450,1525 r90 top
R74 "250K" RESC1005N 4250,1500 r90 top
R75 "10K" RESC1005N 4250,1600 r90 top
R76 "90K" RESC1005N 4250,1700 r90 top
R77 "270K" RESC1005N 4225,1775 r180 top
R78 "5.11K" RESC1005N 5925,2400 r0 top
R79 "10K" RESC1005N 6075,2400 r0 top
S1 "TS-1143S-WP" TS-1143S 4025,475 r0 top
U1 "LPC1769FBD100" SOT407-1_L 3300,2000 r180 top
U2 "74LVC1G04" SC70-LT5_N 1900,1390 r0 top
U3 "LAN8720A" QFN-MJ24 1650,1500 r0 top
U4 "TLV1117LV" SOT-223-DB3_N 7480.24,6205 r0 top
U5 "23LC1024-I/ST" MCHP-TSSOP-ST8_L 2400,2150 r0 top
U6 "23LC1024-I/ST" MCHP-TSSOP-ST8_L 2850,1350 r0 top
U7 "100k" MSOP-UN10_L 4725,2325 r90 top
U8 "100k" MSOP-UN10_L 4075,2325 r90 top
U9 "MCP6024" MCHP-TSSOP-ST14_L 4400,1900 r270 top
U10 "100k" MSOP-UN10_L 4075,1475 r270 top
U11 "AD8608" MCHP-TSSOP-ST14_L 5975,2150 r90 top
U12 "TLV1117LV" SOT-223-DB3_N 7450,2125 r0 top
U13 "ADXL203" LCC8-E-8-1 6000,1700 r90 top
U14 "ADXL103" LCC8-E-8-1 6371.81,4002.13 r90 top
Y1 "12MHz" 4SMD 3625,2450 r0 top
Y2 "32.768kHz" 9HT7-32.768KDZF-T 3825,2550 r90 top
Y3 "25MHz" 4SMD 1375,1475 r90 top

## Footprints (in the part's own frame and the unit in brackets; to place one, negate y for a bottom-side part, rotate by r counter-clockwise, add the part's x,y. Pads: shape width x height; smd on the part's side, far side on the other; paste and mask are expansions set on the pad)
4SMD [mm] "CCrystal"
  rect 2x1.2 smd: 1(-1.85,-1.1) 2(1.85,-1.1) 3(1.85,1.1) 4(-1.85,1.1)
  silkscreen extent -3.05,-2.03 3.05,2.03
9HT7-32.768KDZF-T [mm]
  rect 1.2x0.6 smd: 1(-3.15,-0.45) 2(3.15,-0.45) 3(3.15,0.45) 4(-3.15,0.45)
  silkscreen extent -4.06,-1.02 4.06,1.02
ARJC02-111008B [mil]
  round 50 hole 35: 1(-175,250) 2(-125,350) 3(-75,250) 4(-25,350) 5(25,250) 6(75,350) 7(125,250) 8(175,350)
  round 50 hole 40: 9(-261,-160) 10(-161,-160) 11(161,-160) 12(261,-160)
  round 80 hole 63: 13(310,120) 14(-310,120)
  round 126 hole 126 unplated: 15(225,0) 16(-225,0)
  silkscreen extent -320,200 320,410, body extent -315,-425 315,406, height 533
BTB_B [mil]
  rect 60x40 smd: 1(-400,-45) 2(-300,-45) 3(-200,-45) 4(200,-45) 5(300,-45) 6(400,-45) 7(400,45) 8(300,45) 9(200,45) 10(100,45) 11(0,45) 12(-100,45) 13(-200,45) 14(-300,45) 15(-400,45)
  silkscreen extent -450,-125 450,85
BTB_S [mil]
  rect 60x40 smd: 1(-400,20) 2(-300,20) 3(-200,20) 4(200,20) 5(300,20) 6(400,20)
  rect 60x40 smd far side: 7(400,20) 8(300,20) 9(200,20) 10(100,20) 11(0,20) 12(-100,20) 13(-200,20) 14(-300,20) 15(-400,20)
  silkscreen extent -440,60 440,240
CAP_ELEC_SIZE_D8 [mm] "Capacitor, polarized, aluminum can; 6.3x4.2mm DxH"
  round 0.508 on Mech14: 0(0,0)
  rrect25% 3.5x1.6 smd: 1(2.8,0) 2(-2.8,0)
  silkscreen extent -3.3,-3.3 3.9,3.7, body extent -3.3,-3.3 3.3,3.3, height 4.23
CAPC1005N [mm] "Chip Capacitor, Body 1.0x0.5mm, IPC Medium Density"
  rect 0.8x0.6 smd: 1(-0.6,0) 2(0.6,0)
  silkscreen extent -1.3,-0.2 -1.3,0.2, body extent -0.55,-0.3 0.55,0.3, height 0.6
CAPC1608N [mm] "Chip Capacitor, Body 1.6x0.8mm, IPC Medium Density"
  rect 1x1 smd: 1(-0.8,0) 2(0.8,0)
  silkscreen extent -1.6,-0.4 -1.6,0.4, body extent -0.87,-0.48 0.87,0.48, height 0.85
CAPC2012N [mm] "Chip Capacitor, Body 2.0x1.3mm, IPC Medium Density"
  rect 1.3x1.5 smd: 1(-0.85,0) 2(0.85,0)
  silkscreen extent -1.8,-0.65 -1.8,0.65, body extent -1.1,-0.72 1.1,0.72, height 1.1
CAPC3225N [mm] "Chip Capacitor, Body 3.2x2.5mm, IPC Medium Density"
  rect 5x2 smd: 1(0,5.25)
  rect 4x1.7 smd: 2(0,-5.1)
  silkscreen extent -3.18,-0.4 3.18,3.81, body extent -3.3,-3.3 3.3,3.3, height 1.35
FPC_20P_0.5mm [mm] "Connector; FPC/FFC, SM, 50 Position, Right Angle, Pitch 0.50mm, Body 30.5x5.0mm (LxW), Top Contacts"
  rect 0.3x1.2 smd: 1(-4.75,4.25) 2(-4.25,4.25) 3(-3.75,4.25) 4(-3.25,4.25) 5(-2.75,4.25) 6(-2.25,4.25) 7(-1.75,4.25) 8(-1.25,4.25) 9(-0.75,4.25) 10(-0.25,4.25) 11(0.25,4.25) 12(0.75,4.25) 13(1.25,4.25) 14(1.75,4.25) 15(2.25,4.25) 16(2.75,4.25) 17(3.25,4.25) 18(3.75,4.25) 19(4.25,4.25) 20(4.75,4.25)
  rect 2.4x1.6 smd: 21(-6.85,1.15) 22(6.85,1.15)
  rect 1.6x0.8 smd: 21(-6.45,2.35) 22(6.45,2.35)
  silkscreen extent -7.15,0 7.15,4.72, body extent -7.75,-1.05 7.75,3.95, height 2
"Header 5x2 1.27mm" [mm] "Connector; Header; 5x2 ,1.27mm"
  rect 0.74x2.4 smd: 1(2.54,1.995) 2(2.54,-1.905) 3(1.27,1.995) 4(1.27,-1.905) 5(0,1.995) 6(0,-1.905) 7(-1.27,1.995) 8(-1.27,-1.905) 9(-2.54,1.995) 10(-2.54,-1.905)
  silkscreen extent -3.38,-1.7 3.35,4.25, body extent -3.17,-2.75 3.17,2.75, height 4.68
Holes#1 [mil] "Mounting Holes"
  round 160 hole 120: 0(398.43,-21.1)
Holes#2 [mil] "Mounting Holes"
  round 160 hole 120: 0(598.43,458.43)
Holes#3 [mil] "Mounting Holes"
  round 160 hole 120: 0(-1148.82,958.43)
Holes#4 [mil] "Mounting Holes"
  round 160 hole 120: 0(-1248.82,-521.1)
Holes#5 [mil] "Mounting Holes"
  round 160 hole 120: 0(0,0)
INDC2012N [mm] "Chip Inductor, Body 2.0x0.9mm, IPC Medium Density"
  rect 1.2x1.4 smd: 1(-1.1,0) 2(1.1,0)
  silkscreen extent -0.2,-0.5 0.2,0.5, body extent -1.15,-0.6 1.15,0.6, height 1.2
LCC8-E-8-1 [mm]
  rrect50% 1.5x0.7 smd: 1(-2,1.27)
  rect 1.5x0.7 smd: 2(-2,0) 3(-2,-1.27) 6(2,0) 7(2,1.27)
  rect 0.7x1.5 smd: 4(0,-2) 8(0,2)
  rect 1.5x0.635 smd: 5(2,-1.27)
  silkscreen extent -3.05,-2.79 3.05,2.79, body extent -2.49,-2.24 2.49,2.24, height 1.98
LED-0603-GREEN [mm]
  round 0.254 on Mech14: 0(0,0)
  rrect25% 0.8x0.8 smd: A(-0.85,0) K(0.85,0)
  Component Side pour cut-out: -0.5,0.5 0.5,0.5 0.5,-0.5 -0.5,-0.5
  silkscreen extent -1.55,-0.67 1.68,0.67, body extent -0.8,-0.4 0.8,0.4, height 0.75
LED-0603-RED [mm]
  round 0.254 on Mech14: 0(0,0)
  rrect25% 0.8x0.8 smd: A(-0.85,0) K(0.85,0)
  Component Side pour cut-out: -0.5,0.5 0.5,0.5 0.5,-0.5 -0.5,-0.5
  silkscreen extent -1.55,-0.67 1.68,0.67, body extent -0.8,-0.4 0.8,0.4, height 0.75
MCHP-TSSOP-ST8_L [mm] "SOP, 8-Leads, Body 4.4x3mm, Pitch 0.65mm, IPC High Density"
  oval 1.25x0.35 smd: 1(-2.825,0.975) 2(-2.825,0.325) 3(-2.825,-0.325) 4(-2.825,-0.975) 5(2.825,-0.975) 6(2.825,-0.325) 7(2.825,0.325) 8(2.825,0.975)
  silkscreen extent -2.95,-1.55 1.8,1.82, body extent -2.25,-1.55 2.25,1.55, height 1.2
MCHP-TSSOP-ST14_L [mm] "SOP, 14-Leads, Body 5x4.4mm, Pitch 0.65mm, IPC High Density"
  oval 1.25x0.35 smd: 1(-2.825,1.95) 2(-2.825,1.3) 3(-2.825,0.65) 4(-2.825,0) 5(-2.825,-0.65) 6(-2.825,-1.3) 7(-2.825,-1.95) 8(2.825,-1.95) 9(2.825,-1.3) 10(2.825,-0.65) 11(2.825,0) 12(2.825,0.65) 13(2.825,1.3) 14(2.825,1.95)
  silkscreen extent -2.95,-2.55 1.8,2.8, body extent -2.25,-2.55 2.25,2.55, height 1.2
MHDR1X6 [mm] "Connector; Header; 6 Position"
  rect 1x1 hole 0.6: 1(0,0)
  round 1 hole 0.6: 2(1.27,0) 3(2.54,0) 4(3.81,0) 5(5.08,0) 6(6.35,0)
  silkscreen extent -0.9,-0.9 7.25,0.9
MHDR1X12 [mm] "Connector; Header; 12 Position"
  rect 1x1 hole 0.6: 1(0,0)
  round 1 hole 0.6: 2(1.27,0) 3(2.54,0) 4(3.81,0) 5(5.08,0) 6(6.35,0) 7(7.62,0) 8(8.89,0) 9(10.16,0) 10(11.43,0) 11(12.7,0) 12(13.97,0)
  silkscreen extent -0.9,-0.9 14.87,0.9
MSOP-UN10_L [mm] "TSSOP, 10-Leads, Body 3x3mm, Pitch 0.5mm, IPC High Density"
  oval 1.45x0.25 smd: 1(-2.025,1) 2(-2.025,0.5) 3(-2.025,0) 4(-2.025,-0.5) 5(-2.025,-1) 6(2.025,-1) 7(2.025,-0.5) 8(2.025,0) 9(2.025,0.5) 10(2.025,1)
  silkscreen extent -2.15,-1.55 0.9,1.8, body extent -1.55,-1.55 1.55,1.55, height 1.1
QFN-MJ24 [mm] "QFN, 24-Leads, Body 4x4mm, Pitch 0.5mm, Thermal Pad 2.6x2.6mm, Microchip Recommended"
  rect 0.85x0.3 smd: 1(-1.95,1.25) 2(-1.95,0.75) 3(-1.95,0.25) 4(-1.95,-0.25) 5(-1.95,-0.75) 6(-1.95,-1.25) 13(1.95,-1.25) 14(1.95,-0.75) 15(1.95,-0.25) 16(1.95,0.25) 17(1.95,0.75) 18(1.95,1.25)
  rect 0.3x0.85 smd: 7(-1.25,-1.95) 8(-0.75,-1.95) 9(-0.25,-1.95) 10(0.25,-1.95) 11(0.75,-1.95) 12(1.25,-1.95) 19(1.25,1.95) 20(0.75,1.95) 21(0.25,1.95) 22(-0.25,1.95) 23(-0.75,1.95) 24(-1.25,1.95)
  rect 2.6x2.6 smd paste-1.3: 25(0,0)
  silkscreen extent -2.9,-2.22 2.22,2.22, body extent -2.07,-2.07 2.07,2.07, height 0.9
RESC1005N [mm] "Chip Resistor, Body 1.1x0.5mm, IPC Medium Density"
  rect 0.8x0.7 smd: 1(-0.6,0) 2(0.6,0)
  body extent -0.55,-0.3 0.55,0.3, height 0.4
SC70-LT5_N [mm] "SOT353, 5-Leads, Body 2x1.3mm, Pitch 0.65mm, Lead Span 2.1mm, IPC Medium Density"
  rect 0.85x0.4 smd: 1(-0.95,0.65) 2(-0.95,0) 3(-0.95,-0.65) 4(0.95,-0.65) 5(0.95,0.65)
  silkscreen extent -1.07,-1.15 0.15,1.52, body extent -0.67,-1.12 0.68,1.13, height 1.1
SOD323 [mm] "SOD-323/SC-76; 2 Leads; Body 1.7 x 1.3 mm, (LxW)"
  rect 1.45x0.55 smd: 1(1.175,0) 2(-1.175,0)
  silkscreen extent -0.95,-0.75 0.95,0.75
SOT23-3N [mm] "SOT23, 3-Leads, Body 2.9x1.3mm, Pitch 0.95mm, Lead Span 2.5mm, IPC Medium Density"
  rect 1.5x0.6 smd: 1(-0.95,0.95) 2(-0.95,-0.95) 3(0.95,0)
  silkscreen extent -1.07,-1.5 0.7,1.92, body extent -0.7,-1.5 0.7,1.5, height 1.1
SOT190P230X120-4N [mm] "SOT143, 4-Leads, Body 2.9x1.3mm, Pitch 1.9mm, Lead Span 2.3mm, IPC Medium Density"
  rect 1x1.05 smd: 1(-1.125,0.75)
  rect 1x0.65 smd: 2(-1.125,-0.95) 3(1.125,-0.95) 4(1.125,0.95)
  silkscreen extent -1.47,-1.5 0.4,1.95, body extent -0.7,-1.52 0.7,1.52, height 1.2
SOT323(SC70) [mm] "SOT323, 3-Leads, Body 2x1.3mm, Pitch 0.65mm, Lead Span 2.1mm, IPC Medium Density"
  rect 0.85x0.4 smd: 1(0.95,-0.65) 2(0.95,0.65) 3(-0.95,0)
  silkscreen extent -1.07,-1.15 0.15,1.52, body extent -0.67,-1.12 0.68,1.13, height 1.1
SOT407-1_L [mm] "Thin QFP, 100-Leads, Body 14x14mm, Pitch 0.5mm, IPC High Density"
  oval 1.25x0.25 smd: 1(-7.725,6) 2(-7.725,5.5) 3(-7.725,5) 4(-7.725,4.5) 5(-7.725,4) 6(-7.725,3.5) 7(-7.725,3) 8(-7.725,2.5) 9(-7.725,2) 10(-7.725,1.5) 11(-7.725,1) 12(-7.725,0.5) 13(-7.725,0) 14(-7.725,-0.5) 15(-7.725,-1) 16(-7.725,-1.5) 17(-7.725,-2) 18(-7.725,-2.5) 19(-7.725,-3) 20(-7.725,-3.5) 21(-7.725,-4) 22(-7.725,-4.5) 23(-7.725,-5) 24(-7.725,-5.5) 25(-7.725,-6) 51(7.725,-6) 52(7.725,-5.5) 53(7.725,-5) 54(7.725,-4.5) 55(7.725,-4) 56(7.725,-3.5) 57(7.725,-3) 58(7.725,-2.5) 59(7.725,-2) 60(7.725,-1.5) 61(7.725,-1) 62(7.725,-0.5) 63(7.725,0) 64(7.725,0.5) 65(7.725,1) 66(7.725,1.5) 67(7.725,2) 68(7.725,2.5) 69(7.725,3) 70(7.725,3.5) 71(7.725,4) 72(7.725,4.5) 73(7.725,5) 74(7.725,5.5) 75(7.725,6)
  oval 0.25x1.25 smd: 26(-6,-7.725) 27(-5.5,-7.725) 28(-5,-7.725) 29(-4.5,-7.725) 30(-4,-7.725) 31(-3.5,-7.725) 32(-3,-7.725) 33(-2.5,-7.725) 34(-2,-7.725) 35(-1.5,-7.725) 36(-1,-7.725) 37(-0.5,-7.725) 38(0,-7.725) 39(0.5,-7.725) 40(1,-7.725) 41(1.5,-7.725) 42(2,-7.725) 43(2.5,-7.725) 44(3,-7.725) 45(3.5,-7.725) 46(4,-7.725) 47(4.5,-7.725) 48(5,-7.725) 49(5.5,-7.725) 50(6,-7.725) 76(6,7.725) 77(5.5,7.725) 78(5,7.725) 79(4.5,7.725) 80(4,7.725) 81(3.5,7.725) 82(3,7.725) 83(2.5,7.725) 84(2,7.725) 85(1.5,7.725) 86(1,7.725) 87(0.5,7.725) 88(0,7.725) 89(-0.5,7.725) 90(-1,7.725) 91(-1.5,7.725) 92(-2,7.725) 93(-2.5,7.725) 94(-3,7.725) 95(-3.5,7.725) 96(-4,7.725) 97(-4.5,7.725) 98(-5,7.725) 99(-5.5,7.725) 100(-6,7.725)
  silkscreen extent -7.85,-6.7 6.7,6.8, body extent -7,-7 7,7, height 1.6
SOT-223-DB3_N [mm] "SOT223, 4-Leads, Body 6.5x3.5mm, Pitch 2.3mm, Lead Span 7mm, IPC Medium Density"
  rect 2.2x1 smd: 1(-3,2.3) 2(-3,0) 3(-3,-2.3)
  rect 2.2x3.3 smd: 4(3,0)
  silkscreen extent -3.12,-3.35 1.6,3.47, body extent -1.85,-3.35 1.85,3.35, height 1.8
TS-1143S [mm] "6.5x6.5mm SMD tact switch 4.3mm stem"
  round 0.508 on Mech14: 0(0,0)
  rrect25% 1.4x1 smd: 1(-3.75,2.25) 1(3.75,2.25) 2(-3.75,-2.25) 2(3.75,-2.25)
  silkscreen extent -2.79,-3.35 2.79,3.35, body extent -4,-3.25 4,3.25, height 4.3
USB_micro [mm] "Molex_SMT"
  rect 1.38x0.45 smd: 1(4.826,1.3) 2(4.826,0.65) 3(4.826,0) 4(4.826,-0.649) 5(4.826,-1.299)
  rect 1.9x2.375 smd: MH1(2.166,-2.912) MH4(2.166,2.913)
  rect 2.1x1.475 smd: MH2(4.466,-2.462) MH3(4.464,2.463)
  rect 1.9x1.175 smd: ""(2.166,-0.837) ""(2.166,0.837)
  silkscreen extent 0.01,-4.1 6.46,4.1, body extent 0.11,-3.28 4.83,3.3, height 3.95

## Part data
C1 C2 C3 C4 C5 C6 C7 C8 C13 C14 C16 C17 C19 C20 C21 C22 C23 C28 C29 C30 C31 C34 C35 C36 C40 C41 C42 C47 C48 C53 C54 C55 C56 C58 C60 C63 C64 C67 C68 C69 C70 C72 C73 C75: library part "Capacitor SMD Cer X7R", "Capacitor SMD Cer X7R"
C9 C10 C11 C12 C15 C18 C24 C25 C26 C27 C43 C44 C74 C76 C77: library part "Capacitor SMD Cer NPO", "Capacitor SMD Cer NPO"
C32 C33 C37 C66 C71: library part "Capacitor SMD Alum Elec", "Capacitor SMD Alum Elec"
C38: library part DSK-3R3H224U-HL, "CAP 220MF -20% +80% 3.3V SMD"
C39 C45 C46 C49 C50 C51 C52 C57 C59 C61 C62 C65: library part "Capacitor SMD Cer X5R", "Capacitor SMD Cer X5R"
D1: library part PMEG4005EJ, "DIODE SCHOTTKY 40V 500MA SOD323F"
D2: library part "BAS40 series", "General-purpose Schottky diodes"
D4 D5 D6 D7 D8 D9: "SURFACE MOUNT FAST SWITCHING DIODE"
H1 H2 H3 H4 H5 H6 H7 H8: library part Holes, "Mounting Holes"
J1: "1 Port RJ45 Magjack Connector Through Hole 10/100 Base-TX, AutoMDIX"
J2: "Connector SMD USB Type Micro"
J3: library part "Molex,-LLC 5051102091", "CONN FFC/FPC BOTTOM 20P .5MM R/A"
L1 L2 L3 L4 L5 L6: "EMIFILr (Inductor type) Chip Ferrite Bead"
LED1: library part LED_SMD_Red_0805, "LED, 0805 SMD, Red"
LED2: library part LED_SMD_Green_0805_8mcd, "LED, 0805 SMD, Green"
P1: "Header, 5-Pin, Dual row"
P2: "Header, 6-Pin"
P3 P4: "Header, 12-Pin"
Q1: "PNP General Purpose Transistors"
R1 R2 R3 R4 R5 R6 R7 R8 R9 R10 R11 R12 R13 R14 R15 R16 R17 R18 R19 R20 R21 R22 R23 R24 R25 R26 R27 R28 R29 R30 R31 R32 R33 R34 R35 R36 R37 R38 R39 R40 R41 R42 R43 R44 R45 R46 R47 R48 R49 R50 R51 R52 R53 R54 R55 R56 R57 R58 R59 R60 R61 R62 R63 R64 R65 R66 R67 R68 R69 R70 R71 R72 R73 R74 R75 R76 R77 R78 R79: library part "Resistor SMD chip", "Resistor SMD chip"
S1: library part SW_SMD_PB_4.3mm, "Switch SMD Tact 4.3mm Stem"
U1: "32-bit ARM Cortex-M3 MCU, 512 kB Flash, 64 kB SRAM, Ethernet, USB 2.0 Device/Host/OTG, 12-Bit ADC, DAC, I2S, 100-Pin LQFP"
U3: library part "Microchip LAN8720A", "Small Footprint RMII 10/100 Ethernet  Transceiver with HP Auto-MDIX Support"
U4 U12: "1-A, Positive Fixed-Voltage, Low-Dropout Regulator"
U5 U6: "1024K bits SPI Serial SRAM with SDI and SQI Interface, 2.5 to 5.5 V, 20 MHz, -40 to 85 degC, 8-pin TSSOP (ST8), Tube"
U7 U8 U10: library part AD5272, "1024-/256-Position, 1% Resistor Tolerance Error,   I2C Interface and 50-TP Memory Digital Rheostat"
U9: "Rail-to-Rail Input/Output, 10 MHz Op Amps"
U11: "General Purpose Amplifier 4 Circuit Rail-to-Rail 14-TSSOP"
U13: "Accelerometer X, Y Axis ∮1.7g 0.5Hz ~ 2.5kHz 8-LCC (5x5)"
U14: "Accelerometer X Axis ∮1.7g 0.5Hz ~ 2.5kHz 8-LCC (5x5)"
Y1: library part "CRYSTAL 12M", "Oscillator Crystal"
Y2: library part "CRYSTAL 32.768k", "Oscillator Crystal"
Y3: library part "CRYSTAL 25M", "Oscillator Crystal"

## Via types
v1: diameter 12, hole 8, Component Side to Solder Side, tented both sides, 98 vias
v2: diameter 12, hole 8, Component Side to Solder Side, 33 vias
v3: diameter 19.68, hole 7.87, Component Side to Solder Side, 5 vias

## Nets (pads, with @x,y where several pads share a name; then routed paths per layer and width w, separated by ;. In a path a pad name is that pad's centre, name@x,y a point inside that pad or via, vN(x,y) a via of type N, cw(c..) or ccw(c..) an arc to the next point about the centre after c; other vN are vias at no path point)
3V3: C1.1 C2.1 C3.1 C4.1 C5.1 C6.1 C13.1 C14.1 C17.1 C29.1 C30.1 C36.1 C37.1 C41.1 C42.1 C51.1 C52.1 C53.1 C54.1 C57.1 C58.1 C62.1 C63.1 D4.1 D6.1 D8.1 J1.2 J1.5 L1.1 L2.1 P1.1 P2.1 Q1.2 R1.2 R11.1 R12.1 R22.1 R24.1 R25.1 R27.1 R28.1 R29.1 R30.1 R41.1 R42.1 R43.1 R44.1 R45.1 R46.1 R47.1 R48.1 R49.1 R50.1 R55.1 R56.1 R57.1 R58.1 R69.1 R70.1 R72.1 U1.28 U1.42 U1.54 U1.71 U1.84 U1.96 U2.5 U3.9 U4.2 U4.4 U5.8 U6.8 U7.1 U7.10 U8.1 U9.4 U10.1 | length 7852.7
  Component Side w10: C14.1@1408.46,1150 1408.46,1108.46 1398.62,1098.62 C17.1@1398.62,1075 1600,1075 1640.16,1115.16 U3.9@1640.16,1423.23 ; J1.5@1575,2450 1575,2200 1625,2150 C30.1@1625,2098.62 ; C29.1@1675,2098.62 1675,2150 1725,2200 J1.2@1725,2350 ; v2(1825,1175) R11.1@1825,1226.38 ; C13.1@1923.62,1500 1923.62,1476.38 1937.4,1462.6 U2.5@1937.4,1415.59 ; L2.1@1925,1993.31 v2(1925,2050) ; U5.8@2511.22,2188.39 2538.39,2188.39 2600,2250 C41.1@2626.38,2250 ; U6.8@2961.22,1388.39 2963.39,1388.39 v1(3025,1450) ; U1.71@2995.87,1842.52 v1(3050,1842.52) ; U1.54@2995.87,2177.17 v1(3050,2177.17) ; U1.84@3221.26,1695.87 v1(3221.26,1750) ; v1(3221.26,2250) U1.42@3221.26,2304.13 ; U1.96@3457.48,1695.87 v1(3457.48,1750) 3457.48,1842.52 ; v1(3496.85,2250) U1.28@3496.85,2304.13 ; C62.1@3950,1283.46 v1(3950,1475) ; C63.1@3950,1676.38 v1(3950,1475) ; C54.1@3950,2123.62 v1(3950,2325) ; C52.1@3950,2516.54 v1(3950,2325) ; U8.1@4035.63,2245.28 4035.63,2289.37 4000,2325 v1(3950,2325) ; U10.1@4114.37,1554.72 4114.37,1514.37 4075,1475 v1(3950,1475) ; D8.1@4350,1278.74 4378.74,1278.74 4401.38,1301.38 R72.1@4450,1301.38 ; D6.1@4350,2228.74 v1(4400,2228.74) D4.1@4450,2228.74 ; U9.4@4400,2011.22 v1(4400,2150) ; U7.1@4685.63,2245.28 4685.63,2285.63 4725,2325 v1(4850,2325) ; C53.1@4850,2123.62 v1(4850,2325) ; C51.1@4850,2516.54 v1(4850,2325)
  Inner Layer 1 w10: v1(3950,1475) v1(3950,2325) 4400,2325 ; v1(4400,2150) v1(4400,2228.74) 4400,2325 ; v1(4850,2325) 4400,2325
  Solder Side w10: C42.1@2973.62,1450 v1(3025,1450) ; v1(3050,1842.52) 3142.52,1842.52 3221.26,1921.26 ; v1(3050,2177.17) 3122.83,2177.17 3221.26,2078.74 ; v1(3221.26,1750) 3221.26,1921.26 ; v1(3221.26,2250) 3221.26,2078.74 ; v1(3457.48,1750) 3457.48,1842.52 3300,2000 ; v1(3496.85,2250) 3496.85,2196.85 3300,2000 ; 3221.26,1921.26 3300,2000 ; 3221.26,2078.74 3300,2000
  other v1: 4400,1300
5V: C33.1 C35.1 J3.1 J3.20 L3.2
5V_S: C65.1 C67.1 C69.1 C70.1 C71.1 C72.1 J4.10 J4.11 J4.12 R78.1 U11.4 U12.2 U12.4 U13.8 | length 499.2
  Component Side w10: C72.1@5825,1648.62 5825,1700 ; C70.1@5825,1751.38 5825,1700 ; U13.8@5921.26,1700 5825,1700 ; U11.4@5975,2038.78 v1(5975,2075) ; C67.1@6125,2123.62 v1(6125,2162.5) C65.1@6125,2201.38
  Solder Side w10: v1(5975,2075) 6062.5,2162.5 v1(6125,2162.5)
12V: P3.1
AD0_0: C56.1 R68.2 U1.9 | length 683.9
  Component Side w10: U1.9@3604.13,1921.26 4171.26,1921.26 ; 4169.88,1921.26 4201.38,1952.76 R68.2@4201.38,2025
AD0_1: C55.1 R67.2 U1.8 | length 1090.9
  Component Side w10: U1.8@3604.13,1901.57 4551.57,1901.57 ; 4550.2,1901.57 4598.62,1950 C55.1@4598.62,1975 R67.2@4598.62,2025
AD0_2: C64.1 R77.2 U1.7 | length 685.2
  Component Side w10: U1.7@3604.13,1881.89 4168.11,1881.89 ; 4166.73,1881.89 4201.38,1847.24 R77.2@4201.38,1775
AD0_4: U1.21
AD0_5: U1.20
AD_N: R61.2 R62.2 R63.1 R64.1 R74.2 R75.1 U9.13 U9.14 | length 1336.6
  Component Side w10: R74.2@4250,1523.62 v1(4250,1550) R75.1@4250,1576.38 ; R64.1@4250,2223.62 v1(4250,2250) R62.2@4250,2276.38 ; U9.13@4451.18,1788.78 U9.14@4476.77,1788.78 4513.78,1788.78 ; R63.1@4550,2223.62 v1(4550,2250) R61.2@4550,2276.38
  Solder Side w10: v1(4250,1550) 4250,1600 4350,1700 4350,2100 4250,2200 v1(4250,2250) ; 4350,2000 4550,2200 v1(4550,2250)